# EAGLE board py32f002c (EAGLE 9.6.1)
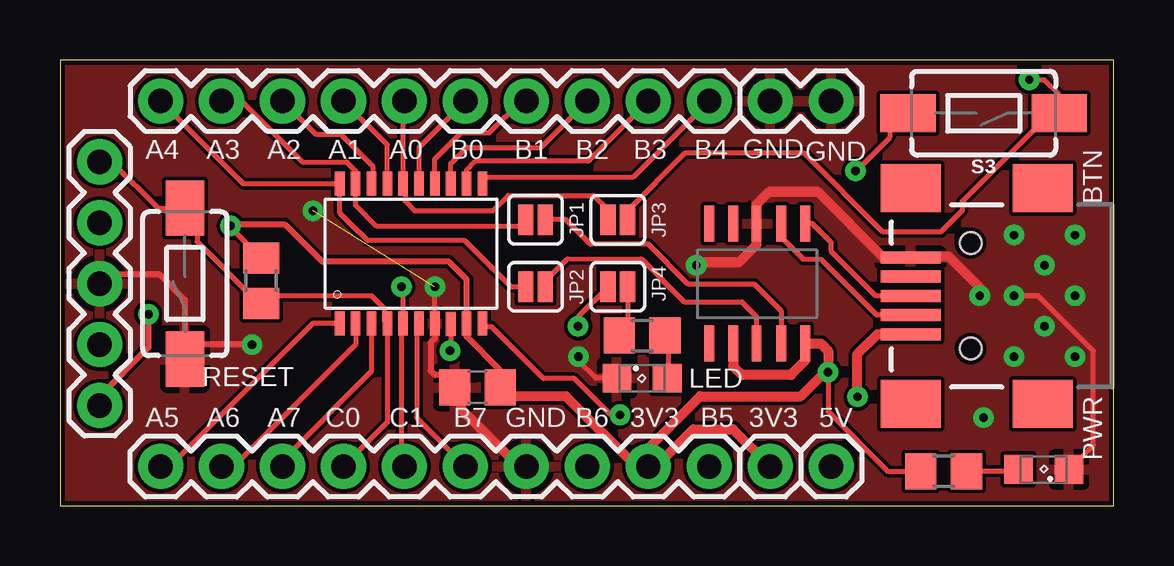
[diagram p0: board, top side]
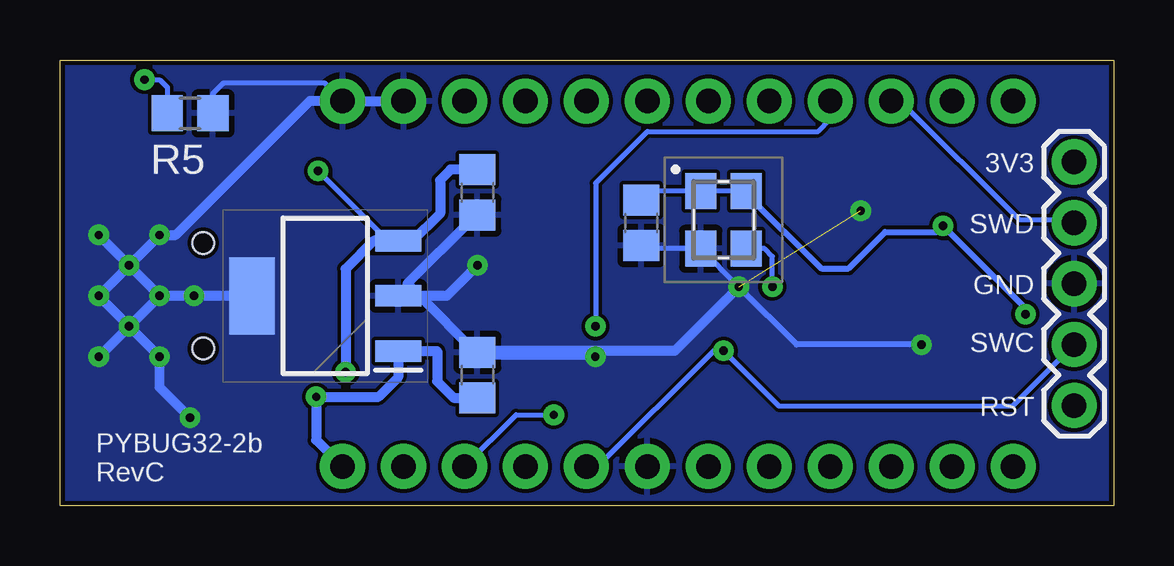
[diagram p1: board, bottom side, seen from below]

Size 43.9 x 18.6 mm. Coordinates in mm from the lower left corner, seen from the top.
Outline: 0,0 43.9,0 43.9,18.6 0,18.6 0,0
Copper layers (1*16): Top 0.035mm / dielectric 1.6mm / Bottom 0.035mm
Design rules "angelo-jlcpcb-2layers": minimum track width 8mil, minimum drill 0.3mm, track to track 6mil, track to pad 6mil, pad to pad 6mil, via to via 10mil, smd to smd 6mil, copper to edge 0.2mm, drill to drill 8mil, minimum pad ring 10mil, minimum via ring 10mil, stop-mask expansion 4mil, vias tented up to drill 0mil, thermal gap 10mil
Net classes: 0 default: width 0.152 mm, drill 0.152 mm, clearance 0.152 mm; 1 logic: width 0.152 mm, drill 0.254 mm, clearance 0.152 mm; 2 power: width 0.406 mm, drill 0.254 mm, clearance 0.203 mm

## Footprints (pad centres in the part's own frame; a part is rotated, then mirrored left to right if it is on the bottom)
C0805 = smd 1.3 x 1.5: 1 -0.95,0; 2 0.95,0
TSSOP20 = smd 1 x 0.4: 1 -2.937,2.693; 2 -2.937,2.032; 3 -2.937,1.372; 4 -2.937,0.712; 5 -2.937,0.051; 6 -2.937,-0.609; 7 -2.937,-1.27; 8 -2.943,-1.93; 9 -2.937,-2.59; 10 -2.937,-3.251; 11 2.905,-3.251; 12 2.905,-2.59; 13 2.911,-1.93; 14 2.905,-1.27; 15 2.905,-0.609; 16 2.905,0.051; 17 2.905,0.712; 18 2.905,1.372; 19 2.905,2.032; 20 2.905,2.693
SOT230P700X180-4N = smd 1.9 x 0.9: 1 -3.05,2.3; 2 -3.05,0; 3 -3.05,-2.3 | smd 1.9 x 3.2: 4 3.05,0
USB-MINIB = smd 2.5 x 0.5: D+ 2.5,0; D- 2.5,0.8; GND 2.5,-1.6; ID 2.5,-0.8; VBUS 2.5,1.6 | smd 2.5 x 2: S1 -3,4.5; S2 2.5,4.5; S3 -3,-4.5; S4 2.5,-4.5 | hole 0.9: 0,2.2; 0,-2.2
1X05 = drill 1.016 pad 1.88: 1 0,0; 2 2.54,0; 3 5.08,0; 4 7.62,0; 5 10.16,0
1X10 = drill 1.016 pad 1.88: 1 0,0; 2 2.54,0; 3 5.08,0; 4 7.62,0; 5 10.16,0; 6 12.7,0; 7 15.24,0; 8 17.78,0; 9 20.32,0; 10 22.86,0
1X02 = drill 1.016 pad 1.88: 1 0,0; 2 2.54,0
SMT-JUMPER_2_NC_PASTE_SILK = smd 0.635 x 1.27: 1 -0.406,0; 2 0.406,0
SML0805 = smd 1.2 x 1.2: A 1.05,0; C -1.05,0
R0805 = smd 1.3 x 1.5: 1 -0.95,0; 2 0.95,0
TACTILE_SWITCH_SMD_6.0X3.5MM = smd 2.3 x 1.6: 1 -3.15,0; 2 3.15,0
ESSOP-10 = smd 1.5 x 0.4: P$1 -2.5,2; P$2 -2.5,1; P$3 -2.5,-0.032; P$4 -2.5,-1; P$5 -2.5,-2; P$6 2.5,-2; P$7 2.5,-1; P$8 2.5,-0.032; P$9 2.5,1; P$10 2.5,2
DSC6083CI1A350K000T = smd 1.5 x 1.3: 1 1.2,0.95; 2 -1.2,0.95; 3 -1.2,-0.95; 4 1.2,-0.95

## Placement (x,y rotation side)
C1  0.1uf  [C0805]  17.4,4.95 180 top
C6  0.1uf  [C0805]  19.68,11.81 270 bottom
C9  4.7uf  [C0805]  26.51,13.08 270 bottom
C10  4.7uf  [C0805]  26.51,5.46 90 bottom
IC1  PY32F002BF15P6TU  [TSSOP20]  14.35,10.54 90 top
IC2  AP2114HA-3.3TRG1  [SOT230P700X180-4N]  32.86,8.76 180 bottom
J1  USB_MINI-B_SMT  [USB-MINIB]  37.94,8.76 180 top
J2  [1X05]  1.65,14.35 270 top
J3  [1X10]  4.19,16.89 0 top
J4  [1X10]  27.05,1.65 180 top
J5  [1X02]  29.59,1.65 0 top
J6  [1X02]  29.59,16.89 0 top
JP1  JUMPER-SMT_2_NC_PASTE_SILK  [SMT-JUMPER_2_NC_PASTE_SILK]  19.81,11.94 180 top
JP2  JUMPER-SMT_2_NC_PASTE_SILK  [SMT-JUMPER_2_NC_PASTE_SILK]  19.81,9.14 180 top
JP3  JUMPER-SMT_2_NC_PASTE_SILK  [SMT-JUMPER_2_NC_PASTE_SILK]  23.24,11.94 0 top
JP4  JUMPER-SMT_2_NC_PASTE_SILK  [SMT-JUMPER_2_NC_PASTE_SILK]  23.24,9.14 0 top
LED  20ma  [SML0805]  24.26,5.33 0 top
PWR  20ma  [SML0805]  40.99,1.52 180 top
R1  [R0805]  8.38,9.4 90 top
R3  100R  [R0805]  24.26,7.11 180 top
R4  100R  [R0805]  36.82,1.46 180 top
R5  [R0805]  38.48,16.38 180 bottom
S1  RESET  [TACTILE_SWITCH_SMD_6.0X3.5MM]  5.21,9.27 90 top
S3  RESET  [TACTILE_SWITCH_SMD_6.0X3.5MM]  38.48,16.38 180 top
U$1  CH430K  [ESSOP-10]  29.05,9.27 270 top
Y1  DSC6083CI1A-350K000T  [DSC6083CI1A350K000T]  16.26,11.94 90 bottom

## Library data of the parts
C1 C6 C9 C10 = rcl; SPICEPREFIX: C
IC1 = angelo-PY32F002BF15P6TU
IC2 = AP2114HA-3.3TRG1; ARROW_PART_NUMBER: AP2114HA-3.3TRG1; ARROW_PRICE-STOCK: https://www.arrow.com/en/products/ap2114ha-3.3trg1/diodes-incorporated?region=asia; DESCRIPTION: Linear Voltage Regulator IC Positive Fixed 1 Output 1A SOT-223-3; HEIGHT: 1.8mm; MANUFACTURER_NAME: Diodes Incorporated; MANUFACTURER_PART_NUMBER: AP2114HA-3.3TRG1; MOUSER_PART_NUMBER: 621-AP2114HA-3.3TRG1; MOUSER_PRICE-STOCK: https://www.mouser.co.uk/ProductDetail/Diodes-Incorporated/AP2114HA-3.3TRG1?qs=M%2FOdCRO8QQ3KWhA9Gt6VoQ%3D%3D
J1 = SparkFun-Connectors; PROD_ID: CONN-08193; SF_ID: PRT-00587
J2 J5 J6 = SparkFun-Connectors
J3 J4 = SparkFun-Connectors; PROD_ID: CONN-11563
JP1-JP4 = SparkFun-Jumpers
LED PWR = led
R1 R3-R5 = rcl; SPICEPREFIX: R
S1 S3 = SparkFun-Switches; PROD_ID: SWCH-14278; SF_SKU: COM-08229
U$1 = ch340k-nopad
Y1 = angelo-DSC6083CI1A-350K000T; ARROW_PART_NUMBER: DSC6083CI1A-350K000T; ARROW_PRICE-STOCK: https://www.arrow.com/en/products/dsc6083ci1a-350k000t/microchip-technology; DESCRIPTION: Standard Clock Oscillators MEMS Oscillator, Ultra Low Power, LVCMOS, -40C-85C, 50ppm, 3.2x2.5mm; HEIGHT: 0.9mm; MANUFACTURER_NAME: Microchip; MANUFACTURER_PART_NUMBER: DSC6083CI1A-350K000T; MOUSER_PART_NUMBER: 579-DSC6083CI1A350K; MOUSER_PRICE-STOCK: https://www.mouser.com/Search/Refine.aspx?Keyword=579-DSC6083CI1A350K

## Nets
+3V3: C1.1 C6.1 C9.1 IC1.9 IC2.3 J2.5 J4.2 J5.1 R1.2 R4.2 S3.2 U$1.P$7 U$1.P$10 Y1.1 Y1.4
GND: C1.2 C6.2 C9.2 C10.2 IC1.7 IC2.2 IC2.4 J1.GND J2.3 J4.4 J6.1 J6.2 LED.C PWR.C R5.1 S1.1 U$1.P$3 Y1.2
N$1: JP3.2 R5.2 S3.1
N$2 [logic]: LED.A R3.1
N$3: JP4.2 R3.2
N$6 [logic]: PWR.A R4.1
PA0: IC1.16 J3.5 JP3.1
PA1: IC1.17 J3.4 JP4.1
PA2-SWC: IC1.18 J2.2 J3.3
PA3-UTX: IC1.19 J3.2 JP1.2
PA4-URX: IC1.20 J3.1 JP2.2
PA5: IC1.1 J4.10
PA6: IC1.2 J4.9
PA7: IC1.3 J4.8
PB0: IC1.15 J3.6
PB1: IC1.14 J3.7
PB2: IC1.13 J3.8
PB3: IC1.12 J3.9
PB4: IC1.11 J3.10
PB5: IC1.10 J4.1
PB6-SWD: IC1.8 J2.4 J4.3
PB7: IC1.6 J4.5
PC0-RST: IC1.4 J2.1 J4.7 R1.1 S1.2
PC1-CLOCK: IC1.5 J4.6 Y1.3
RXD: JP1.1 U$1.P$9
TXD: JP2.1 U$1.P$8
USB_N: J1.D- U$1.P$2
USB_P: J1.D+ U$1.P$1
VBUS: C10.1 IC2.1 J1.VBUS J5.2

## Tracks (layer width: path | path; a pad name or v marks a point on that pad's centre or on a via)
+3V3  (via drill 0.35)
  Top 0.203: v7.11,11.68 7.11,11.62 R1.2 | v32,5.59 32,3.94 34.48,1.46 R4.2 | v33.15,13.97 33.17,13.97 34.57,15.37 34.57,15.62 S3.2
  Top 0.254: v3.68,8 3.68,6.6 1.65,4.57 J2.5 | 7.11,11.62 7.23,11.74 9.38,11.74 10.93,10.19 16.2,10.19 16.94,9.45 IC1.9 16.94,7.06 18.35,5.65 C1.1
  Top 0.406: J4.2 24,1.65 21.08,4.57 18.73,4.57 C1.1 | J4.2 24.51,2.41 26.67,4.57 30.86,4.57 31.88,5.59 v32,5.59 32,6.48 31.71,6.77 U$1.P$10 31.05,6.06 30.45,5.46 28.42,5.46 28.05,5.83 U$1.P$7 | J4.2 24.84,1.65 26.39,3.2 28.04,3.2 J5.1
  Bottom 0.203: 15.37,13.08 Y1.4 Y1.1 19.31,13.14 C6.1 | v33.15,13.97 30.48,11.3 30.48,11.06
  Bottom 0.254: 15.37,13.08 12.19,9.91 11.05,9.91 9.53,11.43 7.37,11.43 v7.11,11.68 3.68,8.26 v3.68,8
  Bottom 0.406: v32,5.59 32,9.89 30.83,11.06 30.48,11.06 IC2.3 29.2,11.06 28.07,12.19 28.07,13.59 27.62,14.03 C9.1
GND  (via drill 0.35)  (1 unrouted)
  Top 0.203: IC1.7 v15.62,9.14 | v15.62,9.14 | S1.1 5.21,6.73 | v39.75,8.76 40.77,8.76 43.05,6.48 43.05,2.54 PWR.C | LED.C 22.32,5.33 21.6,6.05 v21.6,6.22
  Top 0.254: IC1.7 15.62,6.99 15.45,6.81 15.45,5.64 15.62,5.46 15.94,5.46 C1.2 | v8,6.73 5.21,6.73 5.21,8.6 4.13,9.68 2.06,9.68 J2.3
  Top 0.406: v38.32,8.76 38.32,9.12 37.04,10.4 35.48,10.4 J1.GND 34.31,10.36 31.56,13.11 29.55,13.11 29.02,12.57 U$1.P$3 29.02,10.89 28.29,10.16 26.51,10.16 v26.51,10.03 | C1.2 16.7,4.7 16.7,4.06 19.11,1.65 J4.4
  Bottom 0.203: v21.6,6.22 26.32,6.22 C10.2 26.58,6.48 26.64,6.48 | v15.62,9.14 17.21,10.73 Y1.2 19.56,10.74 C6.2 | R5.1 37.53,17.21 37.08,17.65 32.89,17.65 J6.2
  Bottom 0.254: v15.62,9.14 13.21,6.73 v8,6.73
  Bottom 0.406: 28.92,8.76 IC2.2 27.78,8.76 v26.51,10.03 | IC2.4 v38.32,8.76 v39.75,8.76 | C9.2 26.59,12.13 26.73,12.21 26.73,11.97 29.43,9.27 28.92,8.76 | 28.92,8.76 26.64,6.48 18.29,6.48 v15.62,9.14 | J6.1 J6.2 33.5,16.89 39.08,11.3 v39.75,11.3 v41.02,10.03 | v38.48,3.68 39.75,4.95 v39.75,6.22 v41.02,7.49 | v41.02,10.03 v42.29,11.3 | v41.02,10.03 v42.29,8.76 v41.02,7.49 | v41.02,10.03 v39.75,8.76 | v39.75,8.76 v41.02,7.49 | v41.02,7.49 v42.29,6.22
  other vias: 10.54,12.32
  pour Bottom: 0,0 0,18.6 43.9,18.6 43.9,0
  pour Top: 0,0 0,18.6 43.9,18.6 43.9,0
  pour Bottom (no thermals): 33.4,12.06 37.21,12.06 37.21,5.46 33.4,5.46
N$1  (via drill 0.35)
  Top 0.203: JP3.2 23.65,12.32 26.06,14.73 30.99,14.73 34.29,11.43 36.7,11.43 37.59,12.32 37.59,12.7 41.02,16.13 41.38,16.13 S3.1 41.63,17.14 41,17.78 v40.39,17.78
  Bottom 0.203: v40.39,17.78 39.75,17.78 39.43,17.46 R5.2
N$2
  Top 0.203: R3.1 25.33,6.99 25.33,5.33 LED.A
N$3
  Top 0.203: JP4.2 23.65,7.45 R3.2
N$6
  Top 0.203: PWR.A 39.87,1.46 R4.1
PA0
  Top 0.203: J3.5 14.3,16.84 IC1.16 14.38,13.37 14.38,12.71 14.77,12.32 18.03,12.32 18.67,12.95 22.23,12.95 22.84,12.34 JP3.1
PA1  (via drill 0.35)
  Top 0.203: J3.4 13.64,15.06 IC1.17 | JP4.1 21.59,7.9 v21.59,7.49
  Bottom 0.203: v21.59,7.49 21.59,13.46 19.43,15.62 12.32,15.62 11.81,16.13 J3.4
PA2-SWC
  Top 0.203: IC1.18 13.03,13.45 13.03,14.18 11.71,15.49 10.67,15.49 J3.3
  Bottom 0.203: J3.3 8.89,16.89 3.94,11.94 1.78,11.94 J2.2
PA3-UTX
  Top 0.203: JP1.2 19.41,11.66 13.21,11.66 12.32,12.55 IC1.19 12.32,13.97 11.94,14.35 10.12,14.35 7.58,16.89 J3.2
PA4-URX
  Top 0.203: JP2.2 18.8,9.14 16.87,11.07 12.83,11.07 12.47,11.43 12.45,11.43 11.66,12.22 IC1.20 7.64,13.45 J3.1
PA5
  Top 0.203: J4.10 4.57,1.65 10.53,7.6 IC1.1
PA6
  Top 0.203: IC1.2 12.32,6.73 7.24,1.65 J4.9
PA7
  Top 0.203: J4.8 9.27,1.91 12.98,5.61 IC1.3
PB0
  Top 0.203: J3.6 14.96,14.96 IC1.15
PB1
  Top 0.203: J3.7 19.21,16.89 17.89,15.57 16.71,15.57 15.62,14.48 IC1.14
PB2
  Top 0.203: J3.8 20.03,14.95 16.95,14.95 16.28,14.28 IC1.13
PB3
  Top 0.203: J3.9 22,14.38 17.31,14.38 16.94,14.02 IC1.12
PB4
  Top 0.203: J3.10 23.86,13.7 17.73,13.7 17.6,13.57 IC1.11
PB5  (via drill 0.35)
  Top 0.203: IC1.10 17.73,7.48 17.98,7.48 20.14,5.32 21.42,5.32 22.94,3.8 v23.33,3.8
  Bottom 0.203: J4.1 24.9,3.8 v23.33,3.8
PB6-SWD  (via drill 0.35)
  Top 0.203: v16.26,6.48 16.28,6.5 IC1.8
  Bottom 0.203: J4.3 21.5,1.65 16.67,6.48 v16.26,6.48 13.95,4.17 4.21,4.17 J2.4
PB7
  Top 0.203: IC1.6 14.86,7.5 14.86,3.68 J4.5
PC0-RST
  Top 0.203: J4.7 13.64,3.48 IC1.4 13.51,7.73 13.51,8.24 12.99,8.76 8.7,8.76 R1.1 8.26,8.57 8.16,8.57 5.71,11.02 5.71,11.91 S1.2 4.09,12.42 2.16,14.35 J2.1
PC1-CLOCK  (via drill 0.35)
  Top 0.203: J4.6 14.22,1.78 14.22,7.53 IC1.5 14.3,9.07 v14.22,9.14
  Bottom 0.203: v14.22,9.14 14.22,10.41 14.55,10.74 Y1.3
RXD
  Top 0.203: U$1.P$9 30.05,8.14 28.95,9.25 26.19,9.25 24.51,10.92 22.1,10.92 21.08,11.94 JP1.1
TXD
  Top 0.203: U$1.P$8 29.01,7.91 28.41,8.51 26.02,8.51 24.21,10.31 21.14,10.31 20.42,9.6 20.22,9.4 JP2.1
USB_N
  Top 0.203: U$1.P$2 30.05,11.22 30.99,10.29 31.71,10.29 34.03,7.96 J1.D-
USB_P
  Top 0.203: U$1.P$1 31.35,11.77 32.14,10.98 32.14,10.61 33.99,8.76 J1.D+
VBUS  (via drill 0.35)
  Top 0.406: v33.23,4.55 33.23,6.34 34.05,7.16 J1.VBUS
  Bottom 0.406: C10.1 27.5,4.51 28.19,5.21 28.19,6.46 IC2.1 29.81,5.37 30.63,4.55 v33.23,4.55 33.23,2.75 J5.2

## Text on the board
tNames: GND | BTN | A4 | A3 | A2 | A1 | A0 | B0 | B1 | B2 | B3 | B4 | GND | RESET | A5 | A6 | A7 | C0 | C1 | B7 | GND | B6 | 3V3 | B5 | 3V3 | 5V
bNames: 3V3 | SWD | GND | SWC | RST | PYBUG32-2b / RevC